# Altium PCB CW308T_ATSAMR21.PcbDoc
Units mil, origin at the board's own origin, x right, y up, seen from the top; angles counter-clockwise.
Board outline 2070 x 2695 mil, 4 copper layers (Component Side, Ground Plane, Signal Layer 1, Solder Side), stack 33.234 mil thick; 29 components, 41 nets, 190 pads, 102 vias.
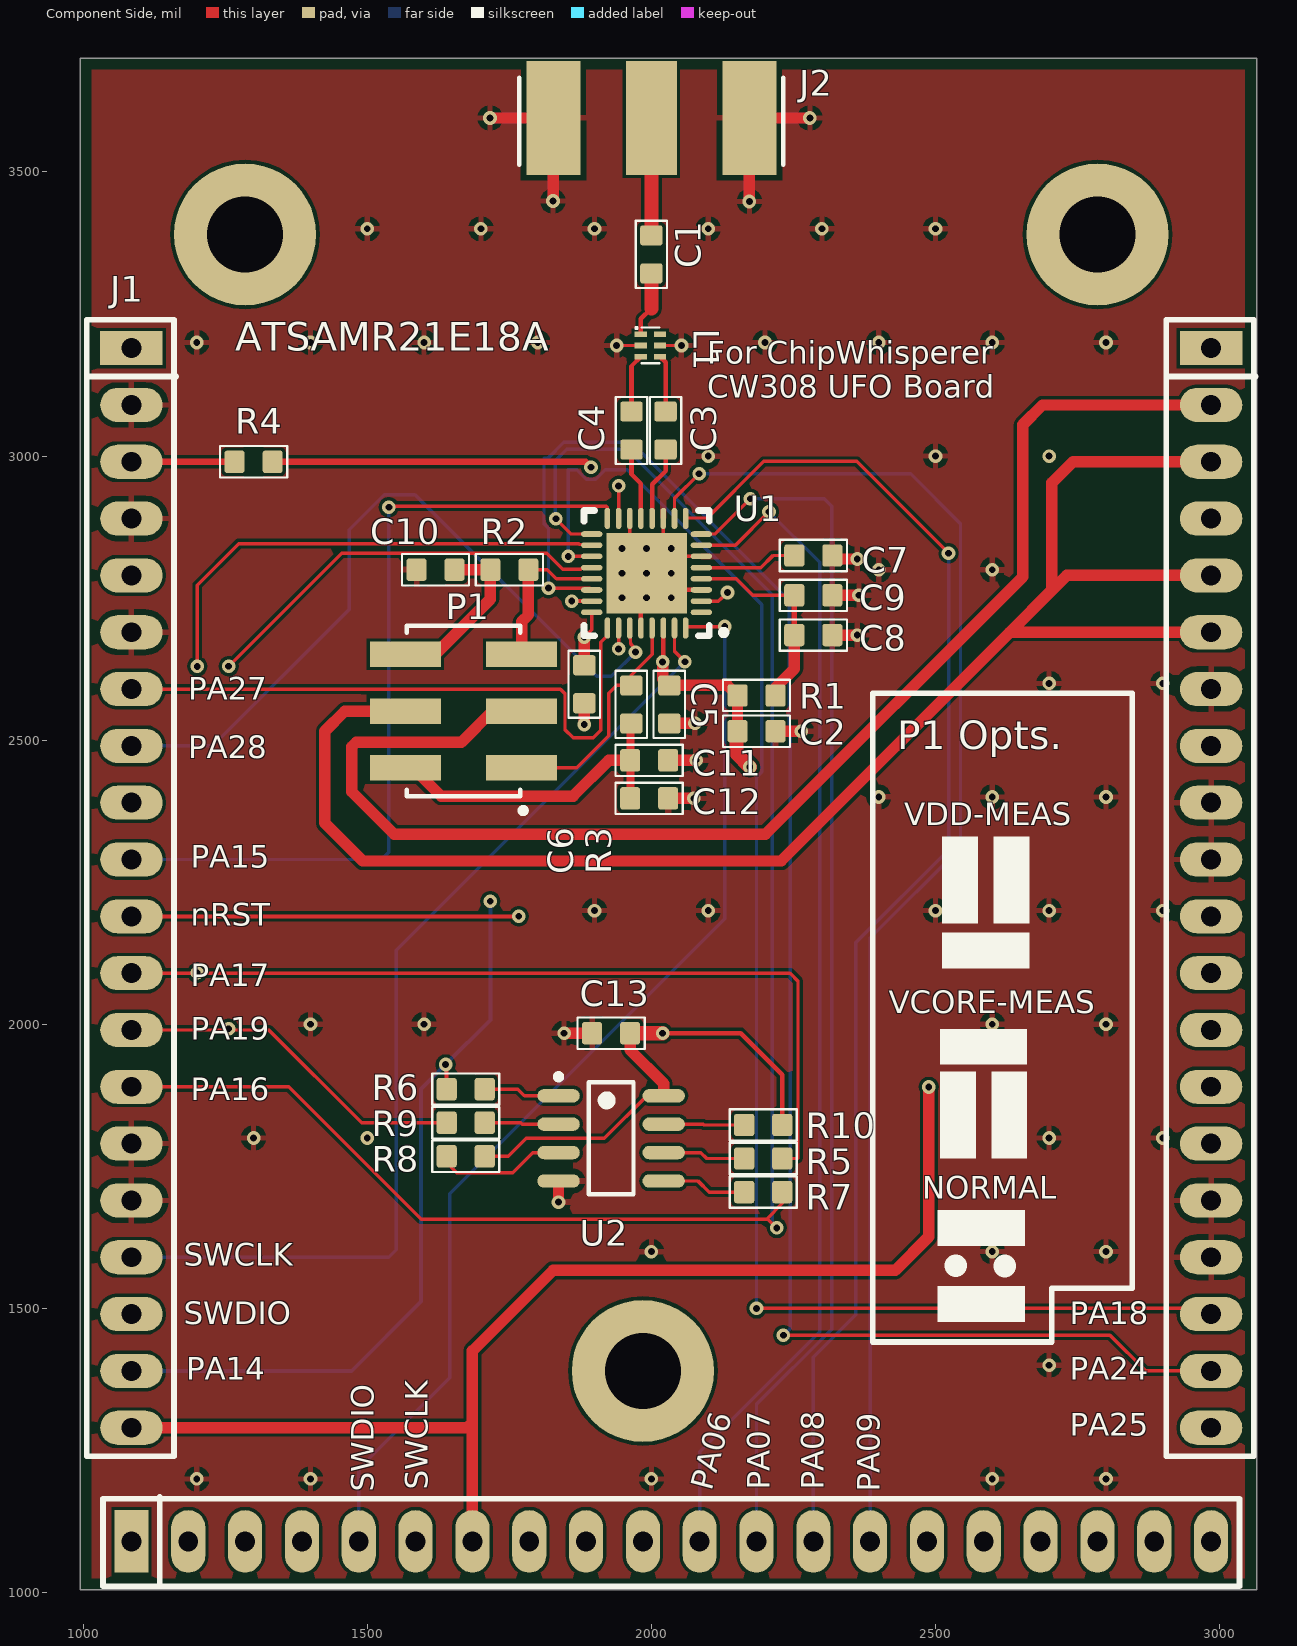
[diagram p0: Component Side view]
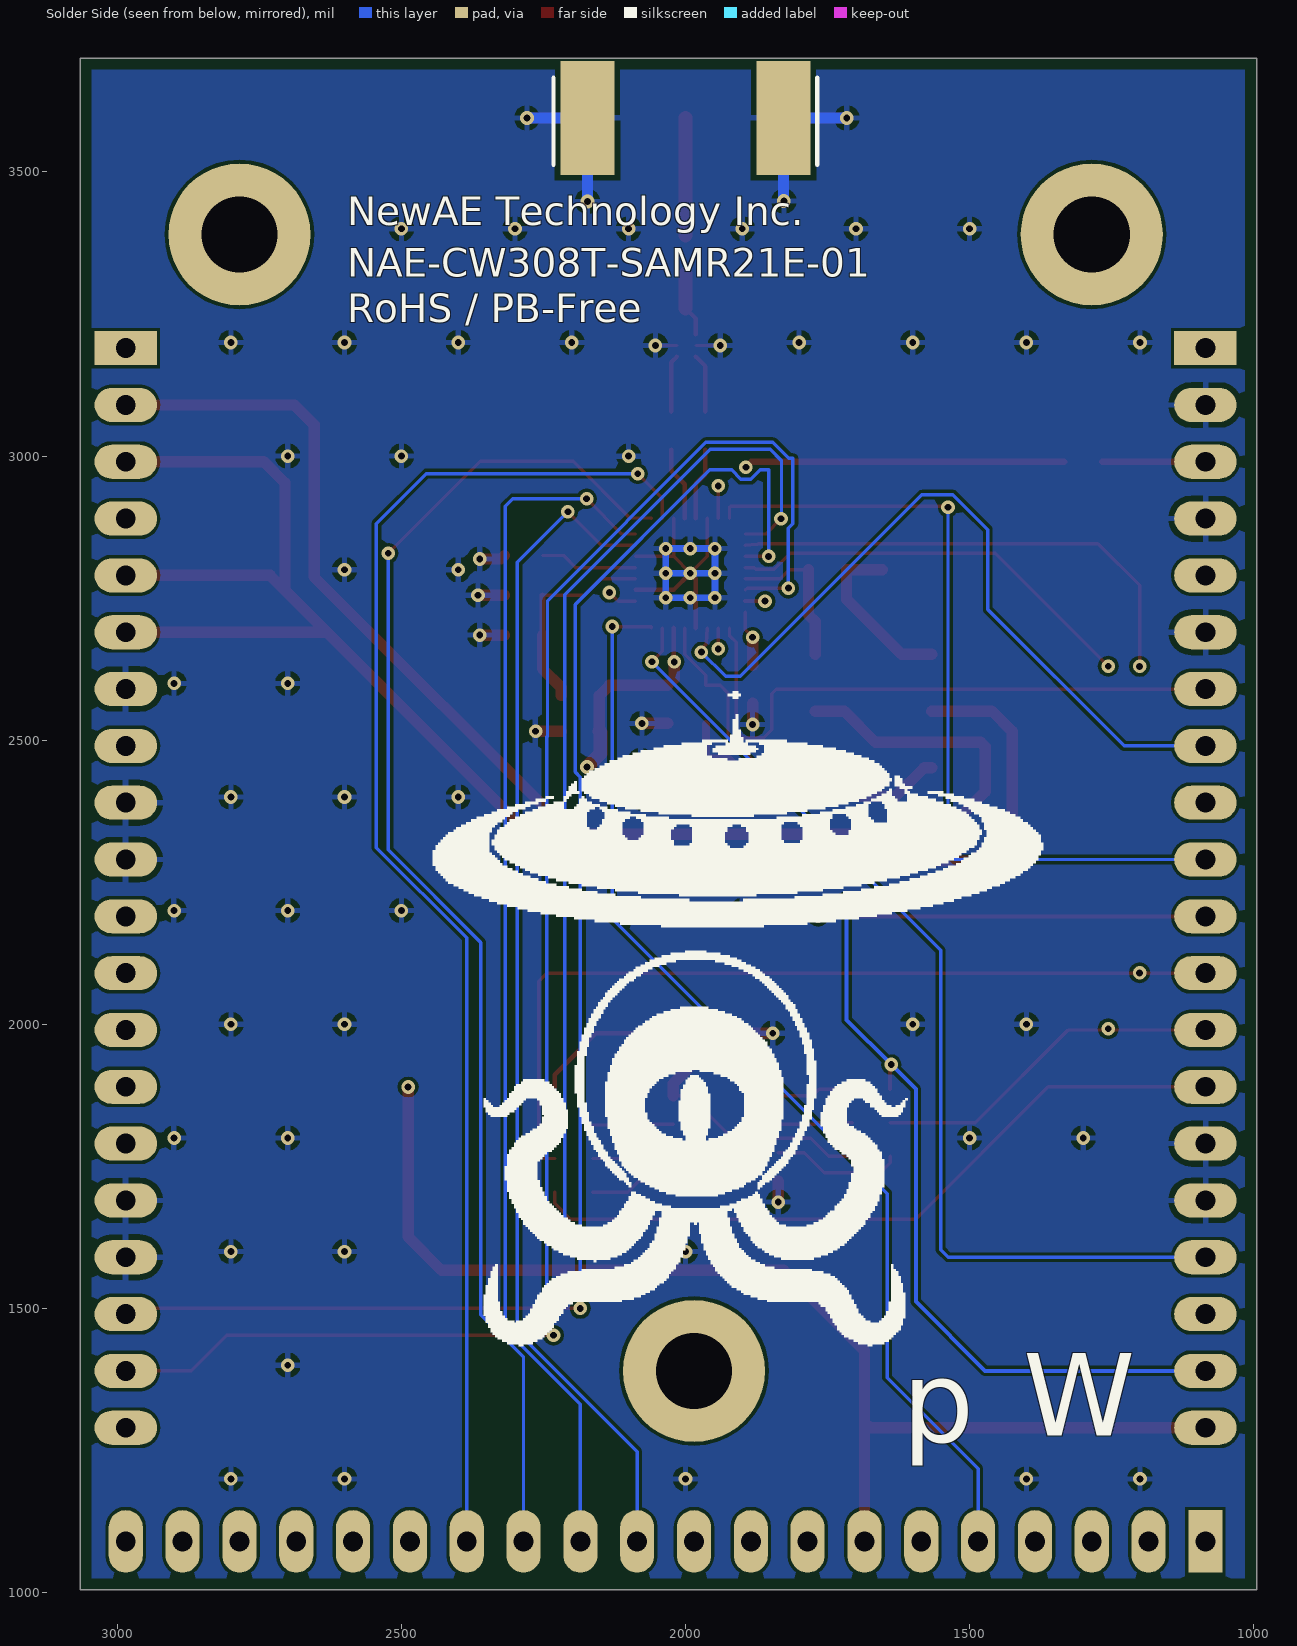
[diagram p1: Solder Side view, seen from below]
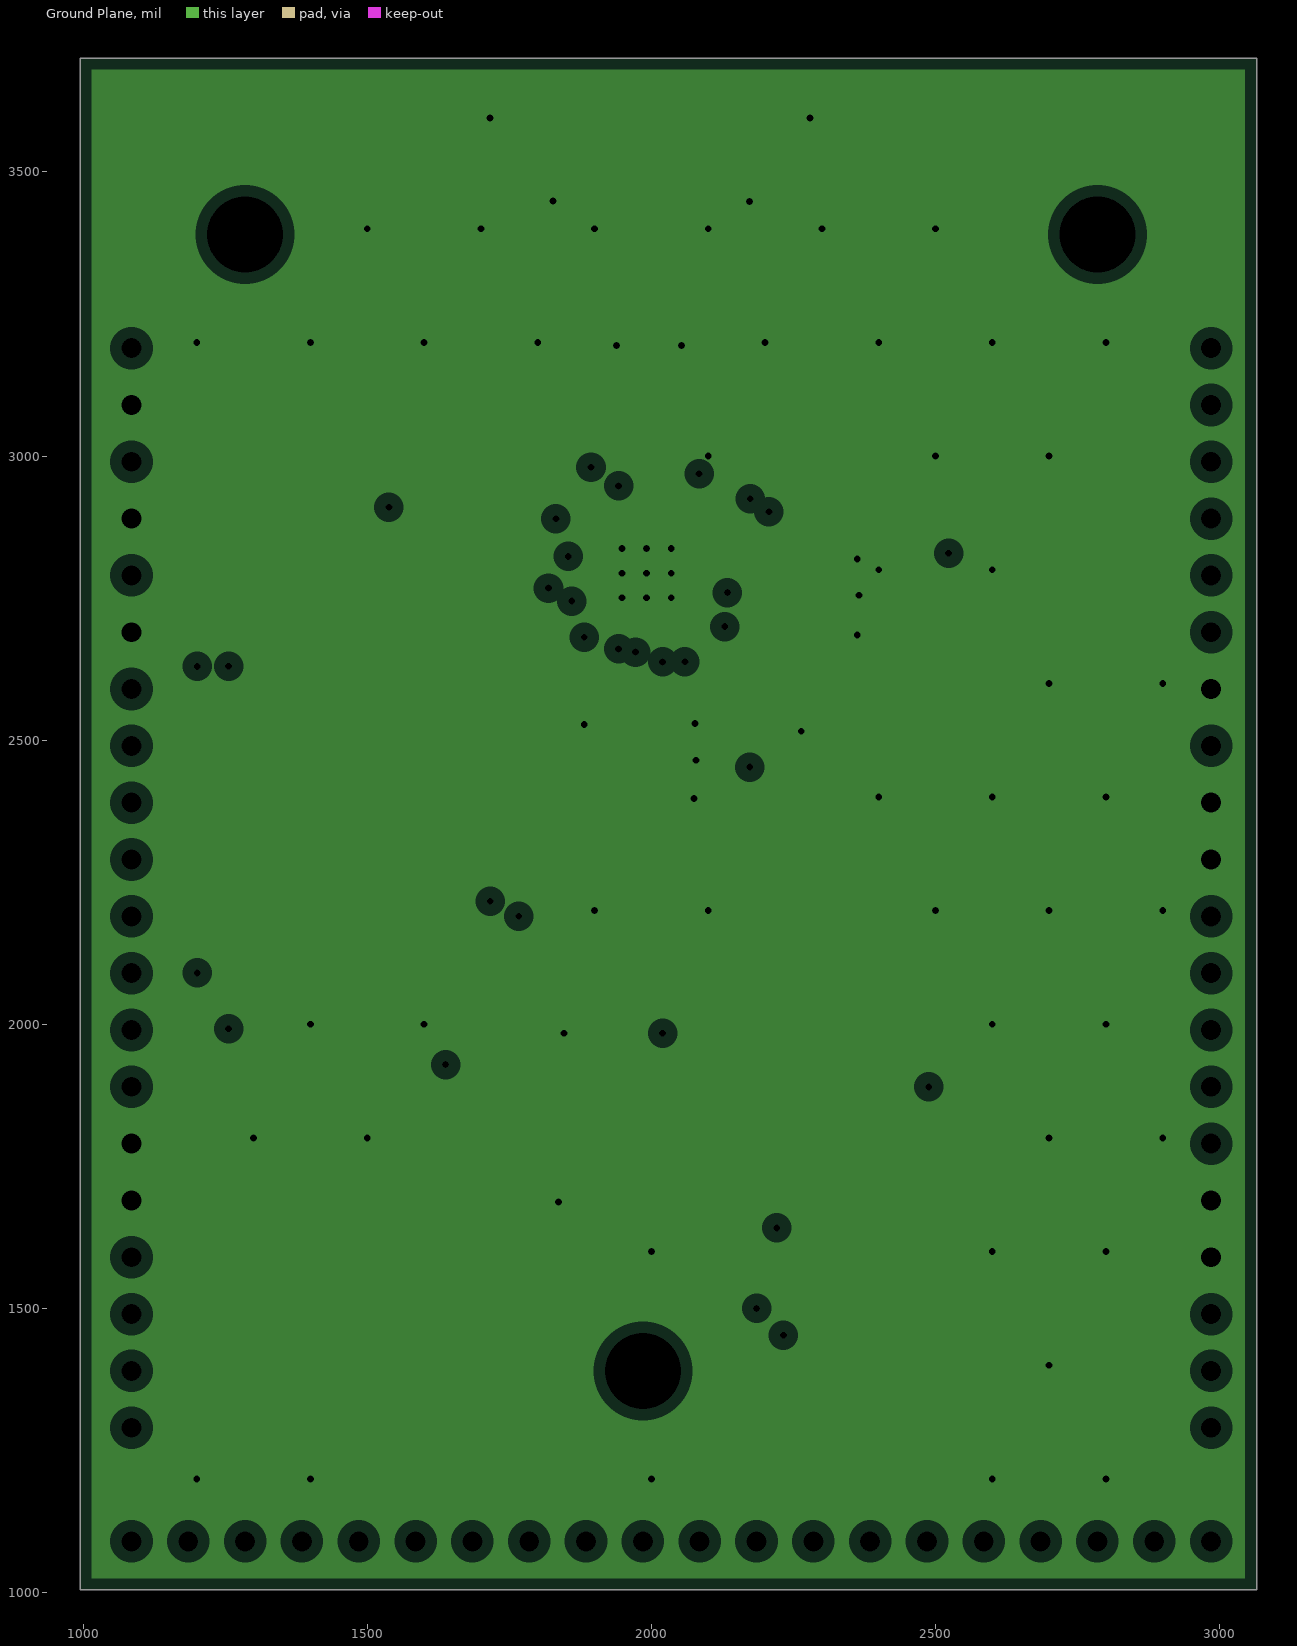
[diagram p2: Ground Plane, clearances drawn from the general rule]
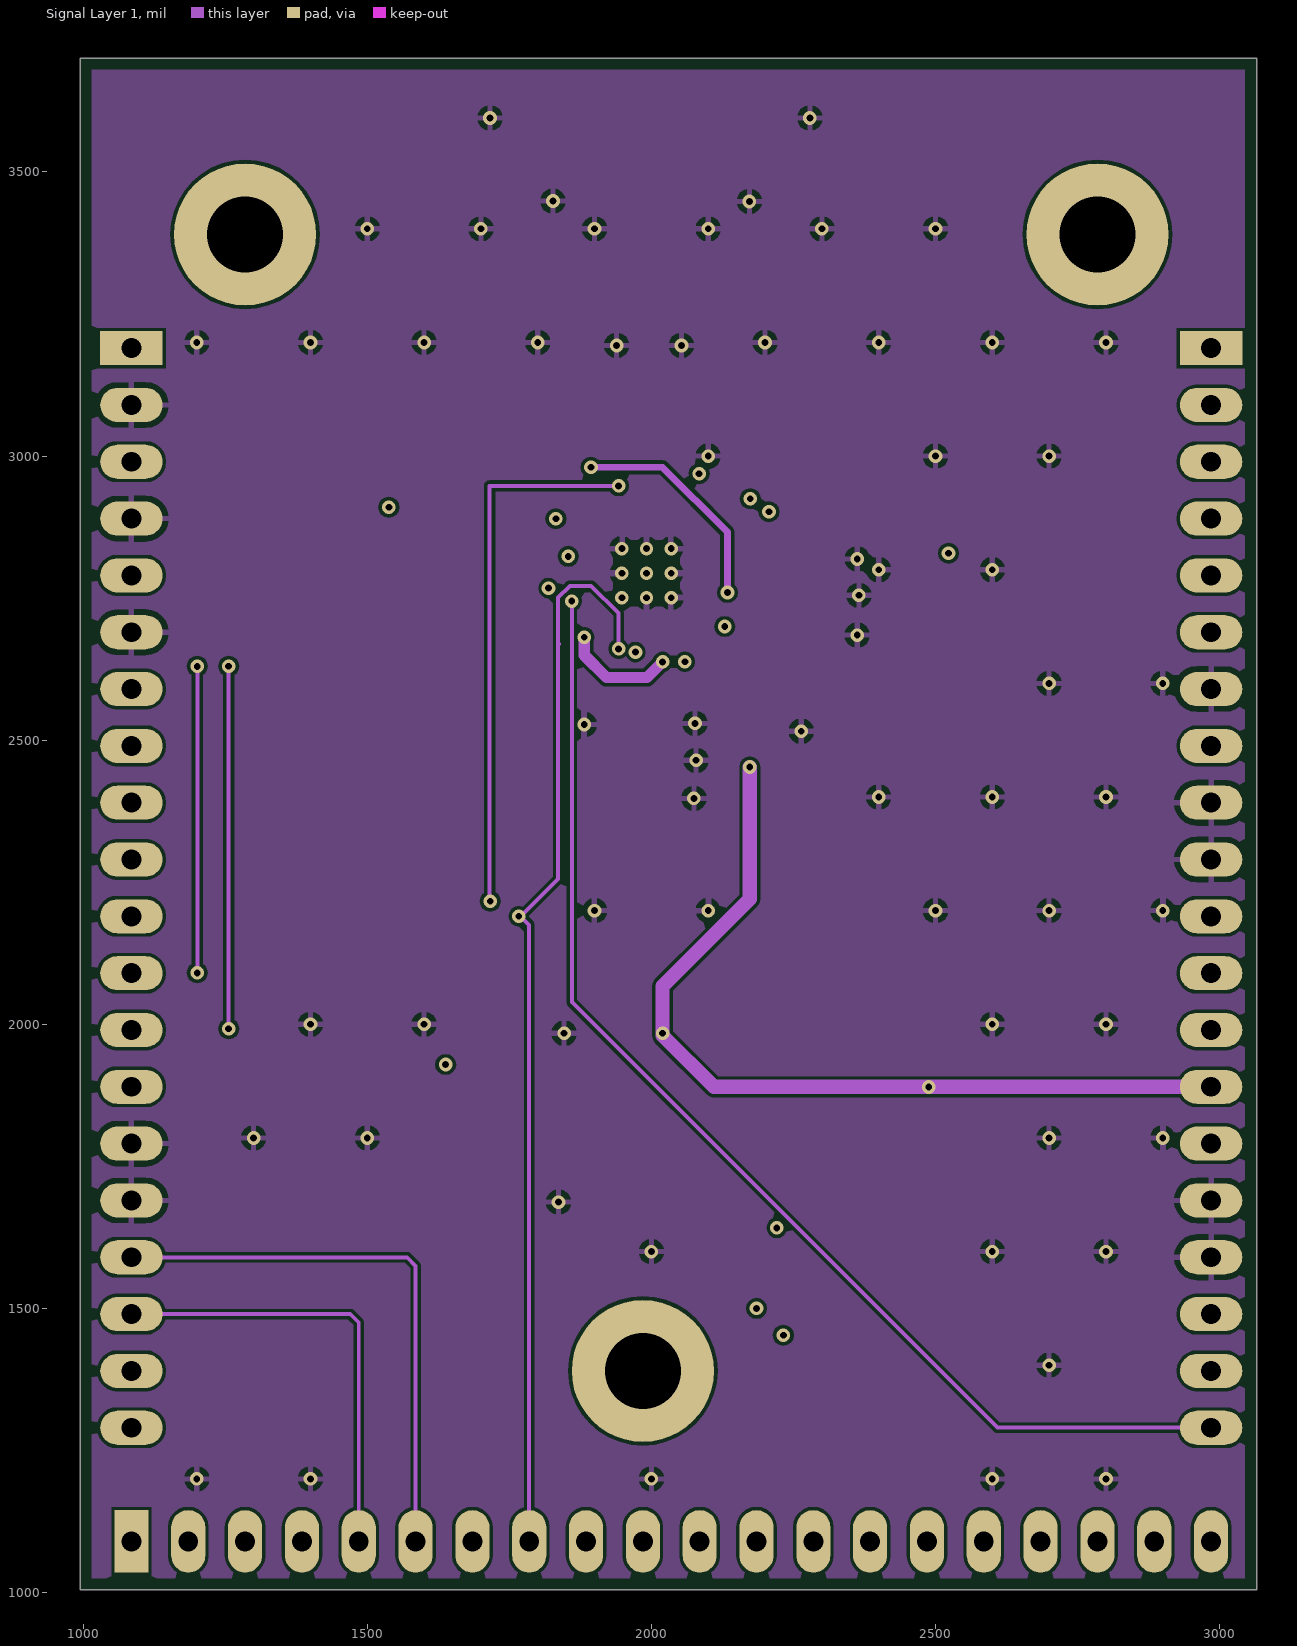
[diagram p3: Signal Layer 1]

## Layer stack, top to bottom
Top Solder: solder mask 0.4, Solder Resist, Dk 3.5
Component Side: signal copper 1.4
Dielectric 1: core 12.6, FR-4, Dk 4.8
Ground Plane: plane copper 1.417, net GND
Dielectric 4: prepreg 5, Dk 4.2
Signal Layer 1: signal copper 1.417
Dielectric 3: core 10, Dk 4.2
Solder Side: signal copper 1.4
Bottom Solder: solder mask 0.4, Solder Resist, Dk 3.5

## Board outline
995,1005 3065,1005 3065,3700 995,3700

## Design rules (kind name [scope] priority, off if disabled: settings)
BoardOutlineClearance [All] p1: gap=20 except(0: Arc-SplitContinuation Track-SplitContinuation SMDPad-SplitContinuation THPad-SplitContinuation Via-SplitContinuation Fill-SplitContinuation Poly-SplitContinuation Region-SplitContinuation Text-SplitContinuation)
Clearance [All] p1: gap=6
PlaneClearance [All] p1: clearance=20
PlaneConnect [All] p1: planeconnectstyle=Relief reliefexpansion=20 reliefentries=4 reliefconductorwidth=10 reliefairgap=10
PolygonConnect [All] p1: connectstyle=Relief reliefconductorwidth=10 reliefentries=4 polygonreliefangle="90 Angle" airgapwidth=10
RoutingVias [All] p1: holewidth=12 width=24 viastyle="Through Hole" minholewidth=10 minwidth=20 maxholewidth=150 maxwidth=200
SolderMaskExpansion [All] p1: expansion=4
Width [All] p1: maxlimit=50 minlimit=6 preferedwidth=7 toplayer_prefwidth=6 midlayer1_minwidth=7 bottomlayer_prefwidth=6 minimp=50.000000 maximp=50.000000 favimp=50.000000
28 further rules are at their usual default settings.

## Components (designator, comment, footprint, x,y, rotation, side; value= is the part's Value field where it differs from the comment)
C1 "18p" CAPC1608X90N 2000,3355 r90 top
C2 "approved sub OK" CAPC1608X90N 2185.04,2515.75 r0 top
C3 "18p" CAPC1608X90N 2025,3045 r90 top
C4 "18p" CAPC1608X90N 1965,3045 r90 top
C5 "approved sub OK" CAPC1608X90N 2031.5,2562.99 r270 top
C6 "approved sub OK" CAPC1608X90N 1881.89,2598.43 r270 top
C7 "approved sub OK" CAPC1608X90N 2285,2825 r0 top
C8 "approved sub OK" CAPC1608X90N 2285,2685 r0 top
C9 "approved sub OK" CAPC1608X90N 2285,2755 r0 top
C10 "approved sub OK" CAPC1608X90N 1620,2800 r180 top
C11 "approved sub OK" CAPC1608X90N 1996.06,2464.57 r0 top
C12 "approved sub OK" CAPC1608X90N 1996.06,2397.64 r0 top
C13 "approved sub OK" CAPC1608X90N 1929.13,1984.25 r180 top
J1 "CW308_TARGETCON" CW308_TBOARD_CONN 1085,3190 r0 top locked
J2 "CON-SMA-PCBEDGE-003.062" CON-SMAM-PCB-EDGE062 2000,3595 r90 top
L1 "2400–2500 MHz" WE-BAL_0603 1998.27,3194.69 r270 top
P1 "HW-03-20-F-D-1000-SM" SMTC-HW-03-20-X-D-1000-SM 1669.29,2551.18 r90 top
R1 "Thick Film" RESC1608X55N 2185.04,2578.74 r0 top
R2 "Thick Film" RESC1608X55N 1750,2800 r0 top
R3 "Thick Film" RESC1608X55N 1964.57,2562.99 r90 top
R4 "Thick Film" RESC1608X55N 1300,2990 r0 top
R5 "Thick Film" RESC1608X55N 2196.85,1763.78 r0 top
R6 "Thick Film" RESC1608X55N 1673.23,1885.83 r0 top
R7 "Thick Film" RESC1608X55N 2196.85,1704.72 r0 top
R8 "Thick Film" RESC1608X55N 1673.23,1767.72 r180 top
R9 "Thick Film" RESC1608X55N 1673.23,1826.77 r180 top
R10 "Thick Film" RESC1608X55N 2196.85,1822.83 r180 top
U1 "ATSAMR21E18A-MU" QFN50P500X500X120_HS-33M 1991.46,2793.9 r180 top
U2 "SST25VF040B-50-4C-SAF-T" MCHP-SOIC-SA8_L 1929.13,1799.21 r0 top

## Footprints (in the part's own frame and the unit in brackets; to place one, negate y for a bottom-side part, rotate by r counter-clockwise, add the part's x,y. Pads: shape width x height; smd on the part's side, far side on the other; paste and mask are expansions set on the pad)
CAPC1608X90N [mm] "Chip Capacitor, Body 1.6x0.8mm, EIA 0603, IPC Medium Density"
  round 0.254 on Mech15: 0(0,0)
  rrect25% 0.9x1 smd: 1(-0.85,0) 2(0.85,0)
  Component Side pour cut-out: -0.6,0.5 -0.4,0.7 0.4,0.7 0.6,0.5 0.6,-0.5 0.4,-0.7 -0.4,-0.7 -0.6,-0.5
  silkscreen extent -1.5,-0.7 1.5,0.7, body extent -0.85,-0.45 0.85,0.45, height 0.89
CON-SMAM-PCB-EDGE062 [mm] "Connector, SMA Edge Mount for 0.062\" Thick Board, 5-Lead"
  rect 5.08x2.29 smd: 1(0,0)
  rect 5.08x2.415 smd: 2(0,-4.383) 5(0,4.383)
  rect 5.08x2.415 smd far side: 3(0,-4.383) 4(0,4.383)
  silkscreen extent -2.1,-5.9 1.8,5.9, body extent -2.15,-4.8 15.3,4.72, height 4.34
CW308_TBOARD_CONN [mil]
  rect 110x60 hole 35: A1(0,0) C1(1900,0)
  oval 110x60 hole 35: A2(0,-100) A3(0,-200) A4(0,-300) A5(0,-400) A6(0,-500) A7(0,-600) A8(0,-700) A9(0,-800) A10(0,-900) A11(0,-1000) A12(0,-1100) A13(0,-1200) A14(0,-1300) A15(0,-1400) A16(0,-1500) A17(0,-1600) A18(0,-1700) A19(0,-1800) A20(0,-1900) C2(1900,-100) C3(1900,-200) C4(1900,-300) C5(1900,-400) C6(1900,-500) C7(1900,-600) C8(1900,-700) C9(1900,-800) C10(1900,-900) C11(1900,-1000) C12(1900,-1100) C13(1900,-1200) C14(1900,-1300) C15(1900,-1400) C16(1900,-1500) C17(1900,-1600) C18(1900,-1700) C19(1900,-1800) C20(1900,-1900)
  rect 60x110 hole 35: B1(0,-2100)
  oval 60x110 hole 35: B2(100,-2100) B3(200,-2100) B4(300,-2100) B5(400,-2100) B6(500,-2100) B7(600,-2100) B8(700,-2100) B9(800,-2100) B10(900,-2100) B11(1000,-2100) B12(1100,-2100) B13(1200,-2100) B14(1300,-2100) B15(1400,-2100) B16(1500,-2100) B17(1600,-2100) B18(1700,-2100) B19(1800,-2100) B20(1900,-2100)
  round 250 hole 134: MH1(200,200) MH2(900,-1800) MH2(1700,200)
  silkscreen extent -79,-2179 1979,50, body extent -50,-2150 1950,50, height 224
MCHP-SOIC-SA8_L [mm] "SOIC, 8-Leads, Body 4.9x3.9mm, Pitch 1.27mm, IPC High Density"
  oval 1.9x0.6 smd: 1(-2.35,1.905) 2(-2.35,0.635) 3(-2.35,-0.635) 4(-2.35,-1.905) 5(2.35,-1.905) 6(2.35,-0.635) 7(2.35,0.635) 8(2.35,1.905)
  silkscreen extent -2.47,-2.5 1,2.88, body extent -2,-2.5 2,2.5, height 1.75
QFN50P500X500X120_HS-33M [mm] "QFN, 32-Leads, Body 5.00x5.00mm, Pitch 0.50mm, Thermal Pad 3.60x3.60mm, IPC Low Density"
  oval 0.95x0.25 smd: 1(-2.45,1.75) 2(-2.45,1.25) 3(-2.45,0.75) 4(-2.45,0.25) 5(-2.45,-0.25) 6(-2.45,-0.75) 7(-2.45,-1.25) 8(-2.45,-1.75) 17(2.45,-1.75) 18(2.45,-1.25) 19(2.45,-0.75) 20(2.45,-0.25) 21(2.45,0.25) 22(2.45,0.75) 23(2.45,1.25) 24(2.45,1.75)
  oval 0.25x0.95 smd: 9(-1.75,-2.45) 10(-1.25,-2.45) 11(-0.75,-2.45) 12(-0.25,-2.45) 13(0.25,-2.45) 14(0.75,-2.45) 15(1.25,-2.45) 16(1.75,-2.45) 25(1.75,2.45) 26(1.25,2.45) 27(0.75,2.45) 28(0.25,2.45) 29(-0.25,2.45) 30(-0.75,2.45) 31(-1.25,2.45) 32(-1.75,2.45)
  rect 3.6x3.6 smd: PAD(0,0)
  silkscreen extent -3.58,-2.8 2.8,2.8, body extent -2.5,-2.5 2.5,2.5, height 1.2
RESC1608X55N [mm] "Chip Resistor, Body 1.6x0.8mm, EIA 0603, IPC Medium Density"
  round 0.254 on Mech15: 0(0,0)
  rrect25% 0.9x1 smd: 1(-0.85,0) 2(0.85,0)
  Component Side pour cut-out: -0.6,0.5 -0.4,0.7 0.4,0.7 0.6,0.5 0.6,-0.5 0.4,-0.7 -0.4,-0.7 -0.6,-0.5
  silkscreen extent -1.5,-0.7 1.5,0.7, body extent -0.87,-0.47 0.88,0.48, height 0.54
SMTC-HW-03-20-X-D-1000-SM [mm] "HW Board to Board Assembly, 2x3 Pins, Vertical, 2.54mm Pitch, Male"
  rect 1.14x3.175 smd: 1(-2.54,-2.603) 2(-2.54,2.602) 3(0,-2.603) 4(0,2.602) 5(2.54,-2.603) 6(2.54,2.602)
  silkscreen extent -4.57,-2.79 3.81,2.54, body extent -3.81,-3.68 3.81,3.68, height 27.05
WE-BAL_0603 [mm]
  rect 0.25x0.55 smd: 1(-0.5,-0.425) 2(0,-0.425) 3(0.5,-0.425) 4(0.5,0.425) 5(0,0.425) 6(-0.5,0.425)
  silkscreen extent -0.82,-0.66 0.8,0.4, body extent -0.8,-0.4 0.8,0.4, height 0.61

## Part data
C1 C3 C4: library part CAPC_18p_0603_100V, "Capacitor SMD Cer 18pF 2% 100V NP0 0603"
C2 C5 C7 C9 C10 C11 C13: library part CAPC_100n_0603_X7R_50V_10%, "Capacitor SMD Cer 100nF 10% 50V X7R 0603"
C6 C8: library part CAPC_10u_0603_6V3, "Capacitor SMD Cer 10uF 10% 10V X5R 0603"
C12: library part CAPC_1u_0603_X7R_16V_10%, "Capacitor SMD Cer 1uF 10% 16V X7R 0603"
J1: library part CW308_TBOARD, "CW308 \"Standard\" Target Board Connector"
J2: "SMA Female Edge Mount Connector for 0.062\" Thick Board"
L1: library part "WE-BAL 0603, 748411245", "WE-BAL Multilayer Chip Balun, Frequence=2400–2500 MHz"
P1: library part CMP-1025-00031-1
R1: library part RES_1R_0603_1%, "Resistor SMD chip 1 Ohm 0.1W 1% 0603"
R2 R3 R4 R5 R6 R7 R8 R9 R10: library part RES_51R_0603_1%, "Resistor SMD chip 51 Ohm 0.1W 1% 0603"
U1: "Atmel Cortex M0 + 802.15.4 Radio"
U2: library part CMP-0378-00095-1, "4 Mbit SPI Serial Flash, 2.7 to 3.6 V, 50 MHz, 0 to 70 degC, 8-pin SOIC (SA8), Tape and Reel"

## Via types
v1: diameter 24, hole 12, Component Side to Solder Side, tented both sides, 62 vias
v2: diameter 24, hole 12, Component Side to Solder Side, 31 vias
v3: diameter 23.62, hole 11.81, Component Side to Solder Side, 9 vias

## Nets (pads, with @x,y where several pads share a name; then routed paths per layer and width w, separated by ;. In a path a pad name is that pad's centre, name@x,y a point inside that pad or via, vN(x,y) a via of type N, cw(c..) or ccw(c..) an arc to the next point about the centre after c; other vN are vias at no path point)
CLKIN: R4.2 U1.2 | length 1010.2
  Component Side w6: U1.2 2118.01,2744.69 2124.26,2750.94 2124.95,2750.94 v2(2133.86,2759.84)
  Component Side w12: R4.2 1884.02,2990 v2(1893.7,2980.32)
  Signal Layer 1 w12: v2(1893.7,2980.32) 2019.68,2980.32 2133.86,2866.14 v2(2133.86,2759.84)
CS: J1.A19 R6.1 U1.15 | length 2375
  Component Side w6: U1.15 v2(1942.24,2947.52)
  Component Side w7: v2(1637.8,1929.13) 1639.76,1927.17 R6.1
  Signal Layer 1 w7: v2(1716.54,2216.54) 1715.24,2217.83 1715.24,2947.52 v2(1942.24,2947.52)
  Solder Side w7: J1.A19 1472.68,1390 1594.49,1511.81 1594.49,1885.83 v2(1637.8,1929.13) 1716.54,2007.87 v2(1716.54,2216.54)
GND: C2.2 C5.2 C6.2 C7.2 C8.2 C9.2 C10.2 C11.2 C12.2 C13.2 J1.A2 J1.A4 J1.A6 J1.A15 J1.A16 J1.C7 J1.C9 J1.C10 J1.C16 J1.C17 J2.2 J2.3 J2.4 J2.5 L1.2 L1.5 U1.3 U1.6 U1.11 U1.14 U1.28 U1.PAD U2.4 | length 2475.4
  Component Side w6: v1(1938.78,3194.69) L1.2 ; U1.14 1961.93,2823.42 v3(1991.46,2793.9) U1.PAD@2020.98,2823.43 ; L1.5 v1(2052.95,3194.69) ; U1.11 U1.PAD@2020.98,2823.43 ; U1.6 U1.PAD@2020.98,2823.43
  Component Side w8: U1.28 1981.61,2784.06 v3(1991.46,2793.9) 2020.98,2764.37 U1.3
  Component Side w20: v1(1716.02,3595) J2.5 1827.46,3449.51 v1(1826.77,3448.82) ; v1(1836.61,1687.01) U2.4 ; v1(1846.46,1984.25) C13.2 ; v1(1881.89,2527.56) C6.2 ; C12.2 v1(2074.8,2397.64) ; C11.2 v1(2078.74,2464.57) ; C5.2 v1(2076.77,2529.53) ; v1(2172.54,3448.13) J2.2 v1(2279.02,3595) ; C2.2 v1(2263.78,2515.75) ; C8.2 v1(2362.17,2685) ; C9.2 v1(2365.24,2755) ; C7.2 2324.57,2818.9 v1(2362.2,2818.9)
  Solder Side w12: v3(1948.15,2793.9) v3(1991.46,2793.9) v3(2034.76,2793.9) ; v3(1948.15,2793.9) v3(1948.15,2837.2) v3(1991.46,2837.2) v3(2034.76,2837.2) v3(2034.76,2793.9) ; v3(1948.15,2793.9) v3(1948.15,2750.59) v3(1991.46,2750.59) v3(2034.76,2750.59) v3(2034.76,2793.9)
  Solder Side w20: v1(1716.02,3595) J2.4 1827.46,3449.51 v1(1826.77,3448.82) ; v1(2172.54,3448.13) J2.3 v1(2279.02,3595)
  other v1: 1200,1200 1400,1200 2000,1200 2600,1200 2800,1200 2700,1400 2000,1600 2600,1600 2800,1600 1300,1800 1500,1800 2700,1800 2900,1800 1400,2000 1600,2000 2600,2000 2800,2000 1900,2200 2100,2200 2500,2200 2700,2200 2900,2200 2400,2400 2600,2400 2800,2400 2700,2600 2900,2600 2400,2800 2600,2800 2100,3000 2500,3000 2700,3000 1200,3200 1400,3200 1600,3200 1800,3200 2200,3200 2400,3200 2600,3200 2800,3200 1500,3400 1700,3400 1900,3400 2100,3400 2300,3400 2500,3400
GPIO4: J1.A10 U1.16 | length 1471.2
  Component Side w6: v2(1538,2910) 1540,2912 1920.56,2912 1922.56,2910 U1.16
  Solder Side w6: J1.A10 1525,2290 1538,2303 v2(1538,2910)
LED1: J1.C18 U1.19 | length 2692.7
  Component Side w6: v2(1853.74,2823.43) U1.19 ; v2(2185.04,1500) 2975,1500 J1.C18
  Solder Side w6: v2(1853.74,2823.43) 1853.74,2975.79 1868.53,2975.79 1885,2959.32 1902.4,2959.32 1918.87,2975.79 1957.28,2975.79 2194.23,2738.84 2194.23,2444.06 2185.04,2434.87 v2(2185.04,1500)
LED2: J1.C19 U1.22 | length 2944.6
  Component Side w6: v2(1818.89,2767.71) 1891.66,2767.71 U1.22 ; v2(2232.28,1452.76) 2807.09,1452.76 2869.84,1390 J1.C19
  Solder Side w6: v2(1818.89,2767.71) 1818.89,2873.2 1811,2881.1 1811,2996.04 1818.07,2996.04 1846.03,3024 1964.19,3024 2242.78,2745.41 2242.78,2507.05 2244.09,2505.73 2244.09,1464.57 v2(2232.28,1452.76)
LED3: J1.C20 U1.23 | length 2175.9
  Component Side w7: v2(1860,2744.69) U1.23
  Signal Layer 1 w7: v2(1860,2744.69) 1860,2039 2609,1290 J1.C20
MISO: J1.A13 R9.2 U1.20 | length 1994.3
  Component Side w6: J1.A13 1326.77,1990 1490,1826.77 R9.2 ; v2(1256,2630) 1455,2829 1816,2829 1844,2801 1876,2801 1878.74,2803.74 U1.20
  Signal Layer 1 w7: v2(1256,1992.22) v2(1256,2630)
MOSI: J1.A14 R7.2 U1.17 | length 3087.4
  Component Side w6: J1.A14 1362,1890 1594.76,1657.24 2202.74,1657.24 ; v2(1832,2889.8) 1859,2862.8 U1.17 ; v2(2220.47,1641.73) 2204.97,1657.24 2202.74,1657.24 ; R7.2 2230.32,1684.82 2202.74,1657.24
  Solder Side w6: v2(1832,2889.8) 1831,2890.8 1831,2992 1851,3012 1956.5,3012 2212.5,2756 2212.5,1649.7 v2(2220.47,1641.73)
NetC1_1: C1.1 L1.1 | length 114.8
  Component Side w8: L1.1 1981.54,3241.38 2000,3259.84
  Component Side w25: 2000,3259.84 C1.1
NetC1_2: C1.2 J2.1 | length 206.5
  Component Side w25: C1.2 J2.1
NetC3_1: C3.1 U1.12 | length 131
  Component Side w8: U1.12 2001.3,2950.12 2025,2973.82 C3.1
NetC3_2: C3.2 L1.4 | length 100.7
  Component Side w8: L1.4 2025,3165 C3.2
NetC4_1: C4.1 U1.13 | length 128.1
  Component Side w8: C4.1 1965,2968.07 1981.61,2951.46 U1.13
NetC4_2: C4.2 L1.3 | length 103.4
  Component Side w8: C4.2 1965,3158.46 L1.3
NetC7_1: C7.1 U1.5 | length 172.4
  Component Side w6: U1.5 2192.8,2803.74 2214.06,2825 C7.1
NetC8_1: C8.1 C9.1 R1.2 U1.4 | length 365.6
  Component Side w6: U1.4 2149.02,2784.06 2178.07,2755 C9.1
  Component Side w10: C8.1 C9.1
  Component Side w20: R1.2 2218.5,2592.52 2251.54,2625.55 C8.1
NetC10_1: C10.1 P1.6 R2.1 | length 304.8
  Component Side w20: P1.6 1619.69,2651.18 1716.54,2748.03 R2.1 C10.1
NetC11_1: C11.1 C12.1 P1.2 R3.1 | length 837.7
  Component Side w12: C12.1@1964.57,2399.61 C12.1 C11.1 1962.6,2527.56 R3.1 ; C12.1@1964.57,2399.61 R3.1 ; C12.1@1964.57,2399.61 R3.1
  Component Side w20: P1.2 1580.32,2451.18 1629.92,2401.57 1862.2,2401.57 1925.2,2464.57 C11.1
NetJ1_A3: J1.A3 R4.1 | length 181.5
  Component Side w12: J1.A3 R4.1
NetP1_1: P1.1 R3.2 U1.29 | length 413
  Component Side w6: P1.1 1868.5,2451.18 1925.2,2507.87 1925.2,2582.68 1938.98,2596.46 R3.2 1964.57,2614.17 2001.3,2650.91 U1.29
NetP1_5: P1.5 R2.2 U1.21 | length 271.8
  Component Side w6: R2.2 1817,2800 1832.94,2784.06 U1.21
  Component Side w20: P1.5 1771.77,2708.78 1783.46,2720.47 R2.2
NetR5_1: R5.1 U2.6 | length 146.1
  Component Side w6: U2.6 2087,1774.21 2097.43,1763.78 R5.1
NetR6_2: R6.2 U2.1 | length 134.7
  Component Side w6: R6.2 1765,1885.83 1776.61,1874.21 U2.1
NetR7_1: R7.1 U2.5 | length 149.8
  Component Side w6: U2.5 2082,1724.21 2101.49,1704.72 R7.1
NetR8_2: R8.2 U2.3 | length 229.8
  Component Side w6: R8.2 1639.76,1756.7 1657.46,1739 1756,1739 1791.21,1774.21 U2.3
NetR9_1: R9.1 U2.2 | length 131
  Component Side w6: R9.1 1770,1826.77 1772.56,1824.21 U2.2
NetR10_2: R10.2 U2.7 | length 142.3
  Component Side w6: U2.7 2091,1824.21 2092.38,1822.83 R10.2
NRST: J1.A11 J1.B8 U1.26 | length 2611.9
  Component Side w6: v2(1942.24,2660.76) U1.26
  Component Side w7: J1.A11 v2(1766.69,2190)
  Signal Layer 1 w7: J1.B8 1785,2175 1770,2190 1836,2256 1836,2668 ; 1837,2669 1836,2668 ; v2(1942.24,2660.76) 1942.24,2723.44 1894.03,2771.65 1856.56,2771.65 1836,2751.09 1836,2668
PA06: J1.B11 U1.7 | length 2079.7
  Component Side w6: U1.7 2148,2843.11 v2(2206.89,2902)
  Solder Side w6: J1.B11 2085,1248 2296,1459 2296,2812.89 v2(2206.89,2902)
PA07: J1.B12 U1.8 | length 2137
  Component Side w6: U1.8 2111.8,2862.8 v2(2174,2925)
  Solder Side w6: v2(2174,2925) 2304,2925 2317.14,2911.86 2317.14,1463.14 2185,1331 J1.B12
PA08: J1.B13 U1.9 | length 2409.2
  Component Side w6: U1.9 2060.35,2891 2098,2891 2197.7,2990.7 2361.3,2990.7 v2(2523,2829)
  Solder Side w6: J1.B13 2285,1414 2360,1489 2360,2144 2523,2307 v2(2523,2829)
PA09: J1.B14 U1.10 | length 2450
  Component Side w6: U1.10 2040.67,2925.67 v2(2084,2969)
  Solder Side w6: v2(2084,2969) 2456.2,2969 2544.03,2881.16 2544.03,2311.03 2385,2152 J1.B14
RX: J1.A8 U1.27 | length 1347.9
  Component Side w6: U1.27 1963.16,2670.7 1972.44,2657.48 v2(1972,2655)
  Solder Side w6: J1.A8 1228,2490 1468,2730 1468,2870.48 1529.76,2932.24 1584,2932 1903.5,2612.5 1929.5,2612.5 v2(1972,2655)
SCK: J1.A12 R5.2 U1.18 | length 2925.4
  Component Side w6: J1.A12 2244,2090 2258,2076 2258,1764.78 2257,1763.78 R5.2 ; v2(1200.79,2629.92) 1200.79,2772.79 1274,2846 1872.11,2846 1873.11,2845 U1.18
  Signal Layer 1 w7: v2(1200.79,2090.55) v2(1200.79,2629.92)
SHUNTH: J1.C3 J1.C5 J1.C6 P1.4 | length 2952.2
  Component Side w20: P1.4 1460.63,2551.18 1425.2,2515.75 1425.2,2354.33 1492.13,2287.4 2228.35,2287.4 2630.94,2690 ; J1.C6 2630.94,2690 ; J1.C5 2730.94,2790 2704.72,2763.78 ; J1.C3 2741.97,2990 2704.72,2952.76 2704.72,2763.78 ; 2630.94,2690 2704.72,2763.78
SHUNTL: J1.C2 P1.3 | length 2417.4
  Component Side w20: P1.3 1720.47,2551.18 1665.35,2496.06 1480.32,2496.06 1472.44,2488.19 1472.44,2409.45 1547.24,2334.65 2200.79,2334.65 2653.54,2787.4 2653.54,3055.12 2688.43,3090 J1.C2
SWCLK: J1.A17 J1.B6 U1.31 | length 3259.8
  Component Side w6: U1.31 2040.67,2656.33 v2(2059,2638)
  Signal Layer 1 w7: J1.B6 1585,1575 1570,1590 ; 1570,1590 J1.A17 1570,1590
  Solder Side w6: J1.A17 1537.5,1590 1551,1603.5 1551,2130 v2(2059,2638)
SWDIO: J1.A18 J1.B5 U1.32 | length 3145.4
  Component Side w6: U1.32 2060.35,2700 v2(2129,2700)
  Signal Layer 1 w7: J1.B5 1485,1475 ; 1470,1490 J1.A18 1470,1490 ; 1470,1490 1485,1475 ; 1470,1490 1485,1475
  Solder Side w6: J1.B5 1485,1218 1645,1378 1645,1702 2129,2186 v2(2129,2700)
TX: J1.A7 U1.25 | length 1089.5
  Component Side w6: J1.A7 1840,2590 1848,2582 1848,2518.14 1862.2,2503.94 1897.64,2503.94 1911,2517.3 1911,2672.44 1922.56,2684 U1.25
VCC: C2.1 C5.1 C6.1 C13.1 J1.A20 J1.B7 J1.C14 R1.1 R8.1 R10.1 U1.24 U1.30 U2.8 | length 5173.9
  Component Side w6: R8.1 1748.03,1767.72 1779.53,1799.21 1917.32,1799.21 1992.32,1874.21 U2.8 ; v2(1881.89,2681.1) 1895,2694.21 U1.24 ; C5.1@2020.98,2606.97 C5.1
  Component Side w8: v2(2019.68,1984.25) 2157.48,1984.25 2230.31,1911.42 R10.1 ; v2(2019.68,2637.8) 2020.98,2639.09 U1.30
  Component Side w20: J1.A20 1675.79,1290 1685,1299.21 ; J1.B7 1685,1299.21 ; C6.1 v2(1881.89,2681.1) ; C13.1 1962.6,1954.72 2021.65,1895.67 U2.8 ; v2(2019.68,2637.8) 2019.68,2608.27 C5.1@2020.98,2606.97 ; C5.1 2133.86,2596.46 R1.1 C2.1 ; v2(2488.19,1889.76) 2488.19,1625.98 2429.13,1566.93 1826.77,1566.93 1685,1425.16 1685,1299.21
  Component Side w25: C13.1 v2(2019.68,1984.25) ; C2.1 2149.61,2513.78 2149.61,2476.38 v2(2173.23,2452.76)
  Signal Layer 1 w20: v2(1881.89,2681.1) 1881.89,2649.61 1921.26,2610.24 1992.13,2610.24 v2(2019.68,2637.8)
  Signal Layer 1 w25: v2(2173.23,2452.76) 2173.23,2220.47 2019.68,2066.93 v2(2019.68,1984.25) 2019.68,1980.32 2110,1890 J1.C14
pads on no net: C1.0 C2.0 C3.0 C4.0 C5.0 C6.0 C7.0 C8.0 C9.0 C10.0 C11.0 C12.0 C13.0 J1.A1 J1.A5 J1.A9 J1.B1 J1.B2 J1.B3 J1.B4 J1.B9 J1.B10 J1.B15 J1.B16 J1.B17 J1.B18 J1.B19 J1.B20 J1.C1 J1.C4 J1.C8 J1.C11 J1.C12 J1.C13 J1.C15 J1.MH1 J1.MH2 L1.6 R1.0 R2.0 R3.0 R4.0 R5.0 R6.0 R7.0 R8.0 R9.0 R10.0 U1.1

## Polygon pours and split planes (outlines as drawn)
GND on Solder Side "GND_BOT" (solid, pour order 0): 893.7,3779.53 3078.74,3779.53 3192.91,3665.35 3181.1,3653.54 3181.1,972.44 3062.99,972.44 3003.94,913.39 2972.44,944.88 921.26,944.88 921.26,1023.62 874.02,1070.87
GND on Component Side "GND_TOP" (solid, pour order 2): 988.19,838.58 1043.31,893.7 3137.8,893.7 3137.8,3779.53 3118.11,3799.21 3059.06,3858.27 846.46,3858.27
GND on Signal Layer 1 "GND_INNER" (solid, pour order 4): 901.57,3811.02 3106.3,3811.02 3212.6,3704.72 3192.91,3685.04 3192.91,933.07 948.82,933.07 917.32,964.57
GND on Ground Plane (split plane): 3044.9,1025.1 1015.1,1025.1 1015.1,3679.9 3044.9,3679.9

## Silkscreen, mask and mechanical layers (free items; w line width, h text height)
Top Overlay:
  region: 2657.48,1476.38 2657.48,1539.37 2503.94,1539.37 2503.94,1476.38
  region: 2657.48,1610.24 2657.48,1673.23 2503.94,1673.23 2503.94,1610.24
  rectangle: 2507.87,1763.78 2570.87,1917.32
  rectangle: 2598.43,1763.78 2661.42,1917.32
  region: 2661.42,1929.13 2661.42,1992.13 2507.87,1992.13 2507.87,1929.13
  region: 2665.35,2098.43 2665.35,2161.42 2511.81,2161.42 2511.81,2098.43
  rectangle: 2602.36,2177.17 2665.35,2330.71
  rectangle: 2511.81,2177.17 2574.8,2330.71
  lines w10: 2389.76,1440.94 2704.72,1440.94 2704.72,1535.43 2846.46,1535.43 2846.46,1704.72 2846.46,2582.68 2389.76,2582.68 2389.76,1704.72 2389.76,1440.94
  lines w39.37: 2535.43,1574.8 ccw(c2524.33,1575.6) 2535.46,1575.6 ; 2622.02,1574.01 ccw(c2610.91,1574.8) 2622.05,1574.8
  text "ATSAMR21E18A" at 1267.72,3185.04 h50
  text "For ChipWhisperer / CW308 UFO Board" at 2098.43,3102.36 h40
  text "PA27" at 1185.04,2570.87 h40
  text "P1 Opts." at 2433.07,2484.25 h50
  text "PA28" at 1185.04,2468.5 h40
  text "VDD-MEAS" at 2444.88,2350.39 h40
  text "PA15" at 1188.98,2275.59 h40
  text "nRST" at 1188.98,2173.23 h40
  text "PA17" at 1188.98,2066.93 h40
  text "VCORE-MEAS" at 2417.32,2019.68 h40
  text "PA19" at 1188.98,1972.44 h40
  text "PA16" at 1188.98,1866.14 h40
  text "NORMAL" at 2476.38,1692.91 h40
  text "SWCLK" at 1177.17,1574.8 h40
  text "SWDIO" at 1177.17,1472.44 h40
  text "PA18" at 2736.22,1472.44 h40
  text "PA14" at 1181.1,1374.02 h40
  text "PA24" at 2736.22,1374.02 h40
  text "PA25" at 2736.22,1275.59 h40
  text "SWCLK" at 1606.3,1181.1 h40 r90
  text "PA07" at 2208.66,1181.1 h40 r90
  text "PA08" at 2303.15,1181.1 h40 r90
  text "SWDIO" at 1511.81,1177.17 h40 r90
  text "PA06" at 2106.3,1177.17 h40 r75
  text "PA09" at 2401.57,1177.17 h40 r90
Bottom Overlay:
  drawing of 7 lines, arcs and shapes, not listed
  text "NewAE Technology Inc." at 2595.43,3405.91 h50
  text "NAE-CW308T-SAMR21E-01" at 2595.43,3315.91 h50
  text "RoHS / PB-Free" at 2595.43,3235.91 h50
  text "W" at 1405.51,1228.35 h250
  text "p" at 1618.11,1216.54 h250
PCB Outline:
  lines w10: 995,4060 1005,4060 ; 995,1005 3065,1005 3065,3625 3065,3700 1365,3700 995,3700 995,3625 995,1005